# EAGLE board tiny24marquee_mitered_truncated (EAGLE 6.2)
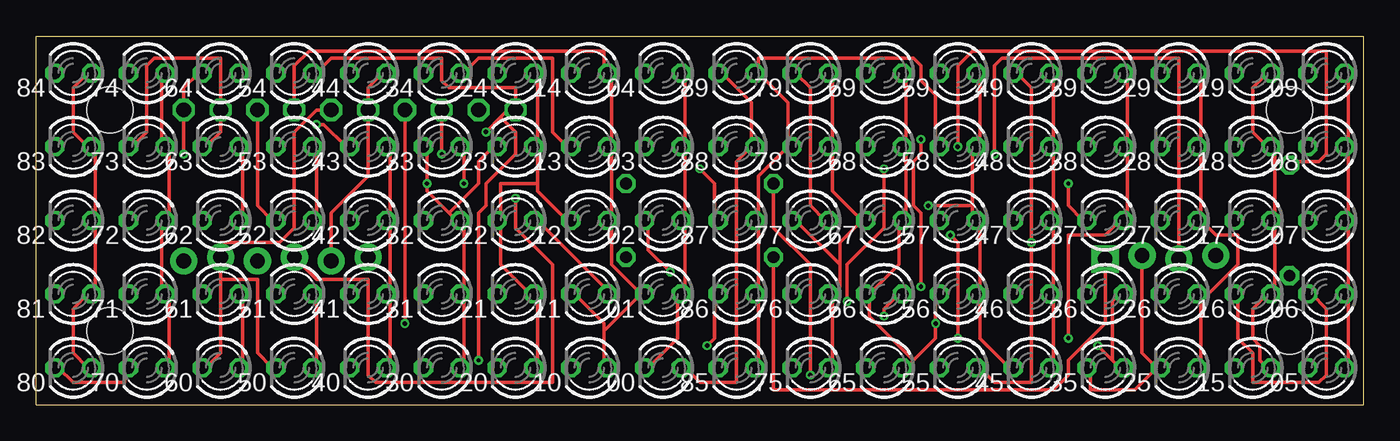
[diagram p0: board, top side]
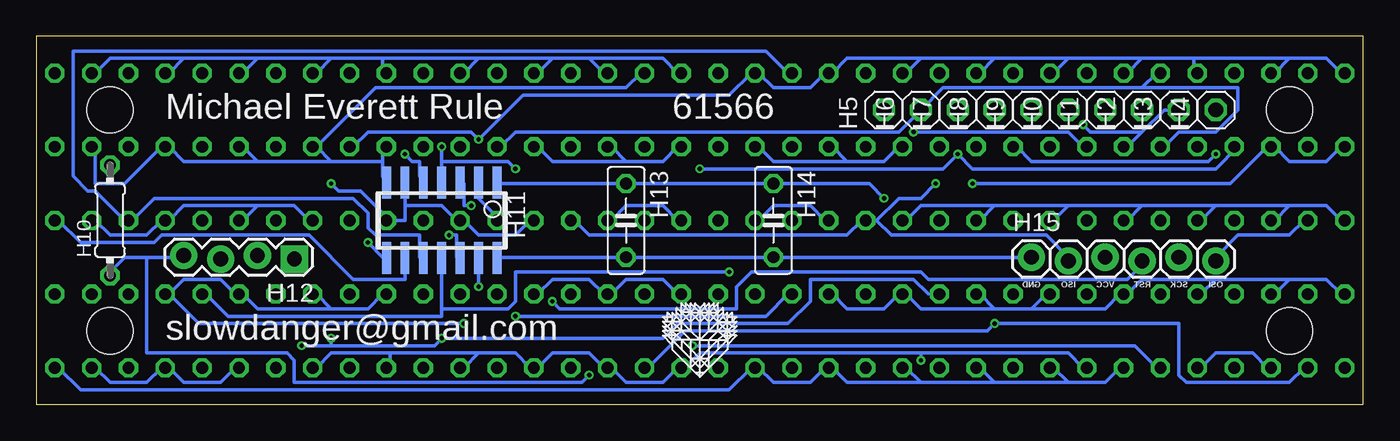
[diagram p1: board, bottom side, seen from below]

Size 91.44 x 25.4 mm. Coordinates in mm from the lower left corner, seen from the top.
Outline: 0,0 91.44,0 91.44,25.4 0,25.4 0,0
Copper layers (1*16): Top 0.035mm / dielectric 1.5mm / Bottom 0.035mm
Design rules: minimum track width 10mil, minimum drill 12mil, track to track 7mil, track to pad 7mil, pad to pad 7mil, via to via 7mil, smd to smd 0mil, copper to edge 20mil, drill to drill 10mil, minimum pad ring 10mil, minimum via ring 6mil, stop-mask expansion 2mil, vias tented up to drill 100mil, thermal gap 10mil
Holes 3.2 mm at 86.36,5.08 5.08,5.08 86.36,20.32 5.08,20.32

## Footprints (pad centres in the part's own frame; a part is rotated, then mirrored left to right if it is on the bottom)
LED3MM = drill 0.813 octagon: A -1.27,0; K 1.27,0
1X01 = drill 1.016 octagon: 1 0,0
0204/7 = drill 0.813 octagon: 1 -3.81,0; 2 3.81,0
SO14 = smd 0.61 x 2.21: 1 -3.81,-2.603; 2 -2.54,-2.603; 3 -1.27,-2.603; 4 0,-2.603; 5 1.27,-2.603; 6 2.54,-2.603; 7 3.81,-2.603; 8 3.81,2.603; 9 2.54,2.603; 10 1.27,2.603; 11 0,2.603; 12 -1.27,2.603; 13 -2.54,2.603; 14 -3.81,2.603
1X04_LOCK = drill 1.016 pad 1.88 square: 1 0,0.127 | drill 1.016 pad 1.88: 2 2.54,-0.127; 3 5.08,0.127; 4 7.62,-0.127
C050-025X075 = drill 0.813 octagon: 1 -2.54,0; 2 2.54,0
1X06_LOCK = drill 1.016 pad 1.88: 1 0,0; 2 2.54,-0.254; 3 5.08,0; 4 7.62,-0.254; 5 10.16,0; 6 12.7,-0.254

## Placement (x,y rotation side)
00  [LED3MM]  43.18,2.54 180 top
01  [LED3MM]  43.18,7.62 180 top
02  [LED3MM]  43.18,12.7 180 top
03  [LED3MM]  43.18,17.78 180 top
04  [LED3MM]  43.18,22.86 180 top
05  [LED3MM]  88.9,2.54 180 top
06  [LED3MM]  88.9,7.62 180 top
07  [LED3MM]  88.9,12.7 180 top
08  [LED3MM]  88.9,17.78 180 top
09  [LED3MM]  88.9,22.86 180 top
10  [LED3MM]  38.1,2.54 180 top
11  [LED3MM]  38.1,7.62 180 top
12  [LED3MM]  38.1,12.7 180 top
13  [LED3MM]  38.1,17.78 180 top
14  [LED3MM]  38.1,22.86 180 top
15  [LED3MM]  83.82,2.54 180 top
16  [LED3MM]  83.82,7.62 180 top
17  [LED3MM]  83.82,12.7 180 top
18  [LED3MM]  83.82,17.78 180 top
19  [LED3MM]  83.82,22.86 180 top
20  [LED3MM]  33.02,2.54 180 top
21  [LED3MM]  33.02,7.62 180 top
22  [LED3MM]  33.02,12.7 180 top
23  [LED3MM]  33.02,17.78 180 top
24  [LED3MM]  33.02,22.86 180 top
25  [LED3MM]  78.74,2.54 180 top
26  [LED3MM]  78.74,7.62 180 top
27  [LED3MM]  78.74,12.7 180 top
28  [LED3MM]  78.74,17.78 180 top
29  [LED3MM]  78.74,22.86 180 top
30  [LED3MM]  27.94,2.54 180 top
31  [LED3MM]  27.94,7.62 180 top
32  [LED3MM]  27.94,12.7 180 top
33  [LED3MM]  27.94,17.78 180 top
34  [LED3MM]  27.94,22.86 180 top
35  [LED3MM]  73.66,2.54 180 top
36  [LED3MM]  73.66,7.62 180 top
37  [LED3MM]  73.66,12.7 180 top
38  [LED3MM]  73.66,17.78 180 top
39  [LED3MM]  73.66,22.86 180 top
40  [LED3MM]  22.86,2.54 180 top
41  [LED3MM]  22.86,7.62 180 top
42  [LED3MM]  22.86,12.7 180 top
43  [LED3MM]  22.86,17.78 180 top
44  [LED3MM]  22.86,22.86 180 top
45  [LED3MM]  68.58,2.54 180 top
46  [LED3MM]  68.58,7.62 180 top
47  [LED3MM]  68.58,12.7 180 top
48  [LED3MM]  68.58,17.78 180 top
49  [LED3MM]  68.58,22.86 180 top
50  [LED3MM]  17.78,2.54 180 top
51  [LED3MM]  17.78,7.62 180 top
52  [LED3MM]  17.78,12.7 180 top
53  [LED3MM]  17.78,17.78 180 top
54  [LED3MM]  17.78,22.86 180 top
55  [LED3MM]  63.5,2.54 180 top
56  [LED3MM]  63.5,7.62 180 top
57  [LED3MM]  63.5,12.7 180 top
58  [LED3MM]  63.5,17.78 180 top
59  [LED3MM]  63.5,22.86 180 top
60  [LED3MM]  12.7,2.54 180 top
61  [LED3MM]  12.7,7.62 180 top
62  [LED3MM]  12.7,12.7 180 top
63  [LED3MM]  12.7,17.78 180 top
64  [LED3MM]  12.7,22.86 180 top
65  [LED3MM]  58.42,2.54 180 top
66  [LED3MM]  58.42,7.62 180 top
67  [LED3MM]  58.42,12.7 180 top
68  [LED3MM]  58.42,17.78 180 top
69  [LED3MM]  58.42,22.86 180 top
70  [LED3MM]  7.62,2.54 180 top
71  [LED3MM]  7.62,7.62 180 top
72  [LED3MM]  7.62,12.7 180 top
73  [LED3MM]  7.62,17.78 180 top
74  [LED3MM]  7.62,22.86 180 top
75  [LED3MM]  53.34,2.54 180 top
76  [LED3MM]  53.34,7.62 180 top
77  [LED3MM]  53.34,12.7 180 top
78  [LED3MM]  53.34,17.78 180 top
79  [LED3MM]  53.34,22.86 180 top
80  [LED3MM]  2.54,2.54 180 top
81  [LED3MM]  2.54,7.62 180 top
82  [LED3MM]  2.54,12.7 180 top
83  [LED3MM]  2.54,17.78 180 top
84  [LED3MM]  2.54,22.86 180 top
85  [LED3MM]  48.26,2.54 180 top
86  [LED3MM]  48.26,7.62 180 top
87  [LED3MM]  48.26,12.7 180 top
88  [LED3MM]  48.26,17.78 180 top
89  [LED3MM]  48.26,22.86 180 top
H0  [1X01]  20.32,20.32 90 bottom
H1  [1X01]  17.78,20.32 90 bottom
H2  [1X01]  15.24,20.32 90 bottom
H3  [1X01]  12.7,20.32 90 bottom
H4  [1X01]  10.16,20.32 90 bottom
H5  [1X01]  33.02,20.32 90 bottom
H6  [1X01]  30.48,20.32 90 bottom
H7  [1X01]  27.94,20.32 90 bottom
H8  [1X01]  25.4,20.32 90 bottom
H9  [1X01]  22.86,20.32 90 bottom
H10  [0204/7]  86.36,12.7 90 bottom
H11  [SO14]  63.5,12.7 180 bottom
H12  [1X04_LOCK]  73.66,10.16 180 bottom
H13  [C050-025X075]  50.8,12.7 270 bottom
H14  [C050-025X075]  40.64,12.7 270 bottom
H15  [1X06_LOCK]  22.86,10.16 0 bottom
H16  [LOGO]  45.72,4.45 0 bottom

## Library data of the parts
00 01-09 10-89 = led
H0 H1-H9 = pinhead
H10 H13 H14 = rcl
H11 = avr-5-4.16
H12 H15 = SparkFun
H16 = mrule2

## Nets
D: 00.A 09.K 11.A 19.K 22.A 29.K 33.A 39.K 44.A 49.K 55.A 59.K 66.A 69.K 77.A 79.K 88.A 89.K H9.1 H11.8 H15.2
S0: 00.K 01.A 02.A 03.A 04.A 05.A 06.A 07.A 08.A 09.A 10.K 20.K 30.K 40.K 50.K 60.K 70.K 80.K H0.1 H11.9 H15.5
S1: 01.K 10.A 11.K 12.A 13.A 14.A 15.A 16.A 17.A 18.A 19.A 21.K 31.K 41.K 51.K 61.K 71.K 81.K H1.1 H11.10
S2: 02.K 12.K 20.A 21.A 22.K 23.A 24.A 25.A 26.A 27.A 28.A 29.A 32.K 42.K 52.K 62.K 72.K 82.K H2.1 H11.11
S3: 03.K 13.K 23.K 30.A 31.A 32.A 33.K 34.A 35.A 36.A 37.A 38.A 39.A 43.K 53.K 63.K 73.K 83.K H3.1 H11.12
S4: 04.K 14.K 24.K 34.K 40.A 41.A 42.A 43.A 44.K 45.A 46.A 47.A 48.A 49.A 54.K 64.K 74.K 84.K H4.1 H11.13
S5: 05.K 15.K 25.K 35.K 45.K 50.A 51.A 52.A 53.A 54.A 55.K 56.A 57.A 58.A 59.A 65.K 75.K 85.K H5.1 H11.3 H12.2
S6: 06.K 16.K 26.K 36.K 46.K 56.K 60.A 61.A 62.A 63.A 64.A 65.A 66.K 67.A 68.A 69.A 76.K 86.K H6.1 H11.2
S7: 07.K 17.K 27.K 37.K 47.K 57.K 67.K 70.A 71.A 72.A 73.A 74.A 75.A 76.A 77.K 78.A 79.A 87.K H7.1 H11.6
S8: 08.K 18.K 28.K 38.K 48.K 58.K 68.K 78.K 80.A 81.A 82.A 83.A 84.A 85.A 86.A 87.A 88.K 89.A H8.1 H11.7 H15.6
S$1: H10.1 H11.1 H12.4 H13.1 H14.1 H15.3
S$2: H10.2 H11.4 H15.4
S$3: H11.14 H12.1 H13.2 H14.2 H15.1
S$4: H11.5 H12.3

## Tracks (layer width: path | path; a pad name or v marks a point on that pad's centre or on a via)
D  (via drill 0.3)
  Top 0.254: 44.A 23.88,22.86 22.86,21.84 H9.1 22.86,15.75 20.32,13.21 H15.2 | 22.A 34.54,12.7 39.12,8.13 39.12,7.62 11.A | v29.46,15.24 29.46,17.78 33.A | v58.42,6.1 58.42,6.6 59.44,7.62 66.A | 49.28,17.78 48.26,16.76 48.26,1.52 45.72,1.52 44.7,2.54 00.A | 49.28,17.78 49.28,20.83 47.24,22.86 89.K | 49.28,17.78 88.A | 49.K 67.56,22.86 68.58,21.84 v68.58,11.18 68.58,1.52 66.04,1.52 65.02,2.54 55.A | 77.A 54.36,12.7 53.34,13.72 53.34,21.84 52.32,22.86 79.K
  Bottom 0.254: v29.46,15.24 30.48,14.22 32,14.22 33.53,12.7 | 33.53,12.7 22.A 34.54,12.7 35.56,11.68 53.34,11.68 54.36,12.7 77.A | v58.42,6.1 41.15,6.1 39.62,7.62 11.A | 33.53,12.7 32.51,11.68 21.84,11.68 20.32,10.16 H15.2 | v68.58,11.18 67.56,10.16 H11.8 | 53.34,23.88 52.32,22.86 79.K | 55.88,23.88 53.34,23.88 | 55.88,23.88 56.9,22.86 69.K | 60.96,23.88 61.98,22.86 59.K | 55.88,23.88 60.96,23.88 | 71.12,23.88 72.14,22.86 39.K | 60.96,23.88 67.56,23.88 | 67.56,23.88 71.12,23.88 | 76.2,23.88 77.22,22.86 29.K | 71.12,23.88 76.2,23.88 | 81.28,23.88 82.3,22.86 19.K | 76.2,23.88 81.28,23.88 | 81.28,23.88 86.36,23.88 87.38,22.86 09.K | 67.56,23.88 67.56,22.86 49.K | 53.34,23.88 48.26,23.88 47.24,22.86 89.K
S0
  Top 0.254: 90.42,17.78 90.42,22.86 09.A | 90.42,7.62 90.42,2.54 05.A | 90.42,12.7 90.42,7.62 | 90.42,7.62 06.A | 90.42,12.7 90.42,17.78 | 90.42,17.78 08.A | 90.42,12.7 07.A | 80.K 1.52,2.54 2.54,1.52 6.1,1.52 6.1,2.54 70.K | 12.7,8.64 H15.5 12.7,11.18 16.76,11.18 17.78,12.19 17.78,18.8 19.3,20.32 H0.1 | 12.7,8.64 12.7,3.56 11.68,2.54 60.K | 00.K 42.16,2.54 44.2,4.57 44.2,7.62 01.A 44.7,7.62 44.7,12.7 | 44.7,17.78 44.7,12.7 | 44.7,17.78 44.7,22.86 04.A | 44.7,17.78 03.A | 44.7,12.7 02.A | 12.7,8.64 15.24,8.64 15.24,3.56 16.26,2.54 50.K
  Bottom 0.254: H11.9 66.04,8.64 69.6,8.64 72.64,11.68 82.8,11.68 83.31,11.18 88.39,11.18 89.92,12.7 07.A | 70.K 6.6,2.54 7.62,3.56 10.16,3.56 11.18,2.54 60.K | 20.32,1.52 17.78,1.52 16.76,2.54 50.K | 20.32,1.52 21.34,2.54 40.K | 25.4,1.52 26.42,2.54 30.K | 20.32,1.52 25.4,1.52 | 30.48,1.52 31.5,2.54 20.K | 25.4,1.52 30.48,1.52 | 30.48,1.52 35.56,1.52 36.58,2.54 10.K 37.08,2.54 38.1,1.52 40.64,1.52 41.66,2.54 00.K 42.16,2.54 43.69,1.02 88.39,1.02 89.92,2.54 05.A
S1
  Top 0.254: 15.A 84.84,2.54 84.33,3.05 84.33,4.06 83.82,4.57 83.82,6.6 84.84,7.62 16.A 85.34,7.62 85.34,12.7 | 85.34,12.7 85.34,17.78 18.A 84.84,17.78 83.82,18.8 83.82,21.84 84.84,22.86 19.A | 85.34,12.7 17.A | 39.12,5.08 39.12,2.54 10.A | 39.12,5.08 39.12,5.59 37.08,7.62 11.K | 39.12,5.08 41.66,7.62 | 39.62,17.78 39.62,12.7 | 39.62,17.78 39.62,22.86 14.A 39.12,22.86 39.12,24.38 18.8,24.38 17.78,23.37 H1.1 | 39.62,17.78 13.A | 41.66,7.62 39.62,9.65 39.62,12.7 | 41.66,7.62 01.K | 39.62,12.7 12.A
  Bottom 0.254: H11.10 65.02,10.16 65.02,11.68 68.07,11.68 68.58,12.19 68.58,13.21 69.6,14.22 83.31,14.22 84.84,12.7 17.A 85.34,12.7 87.38,14.73 87.88,14.73 88.9,15.75 88.9,24.38 41.15,24.38 39.62,22.86 14.A | 5.08,8.64 2.54,8.64 1.52,7.62 81.K | 5.08,8.64 6.1,7.62 71.K | 10.16,8.64 11.18,7.62 61.K | 5.08,8.64 10.16,8.64 | 10.16,8.64 15.24,8.64 16.26,7.62 51.K 16.76,7.62 17.78,6.6 22.86,6.6 | 22.86,6.6 21.84,7.62 41.K | 25.4,6.6 22.86,6.6 | 25.4,6.6 26.42,7.62 31.K | 25.4,6.6 30.48,6.6 31.5,7.62 21.K 32,7.62 33.02,6.6 35.56,6.6 36.58,7.62 11.K
S2  (via drill 0.3)
  Top 0.254: 80.26,17.78 80.26,12.7 | 80.26,17.78 80.26,22.86 29.A | 80.26,17.78 28.A | 80.26,7.11 80.26,7.62 26.A 80.26,7.11 | 80.26,7.11 80.26,2.54 25.A | 80.26,12.7 81.28,11.68 82.8,11.68 82.8,9.65 80.26,7.11 | 80.26,12.7 27.A | 34.54,17.78 34.54,22.86 24.A | 34.54,17.78 34.54,15.24 | 34.54,15.24 34.54,14.73 36.58,12.7 12.K | 34.54,17.78 23.A | 20.A 34.54,2.54 34.54,7.62 21.A 34.04,7.62 32,9.65 32,12.7 | H2.1 15.24,13.72 16.26,12.7 52.K | 34.54,15.24 32,15.24 32,12.7 | 32,12.7 22.K | v43.69,9.14 42.16,10.67 42.16,12.7 02.K
  Bottom 0.254: 63.5,6.6 63.5,6.1 78.23,6.1 79.76,7.62 26.A | 63.5,6.6 H11.11 | 02.K 41.66,12.7 40.64,13.72 38.1,13.72 37.08,12.7 12.K | 5.08,13.72 2.54,13.72 1.52,12.7 82.K | 5.08,13.72 6.1,12.7 72.K | 10.16,13.72 11.18,12.7 62.K | 5.08,13.72 10.16,13.72 | 15.24,13.72 16.26,12.7 52.K | 10.16,13.72 15.24,13.72 | 20.32,13.72 21.34,12.7 42.K | 15.24,13.72 20.32,13.72 | 25.4,13.72 26.42,12.7 32.K | 20.32,13.72 25.4,13.72 | 25.4,13.72 30.48,13.72 31.5,12.7 22.K | 63.5,6.6 58.93,6.6 58.42,7.11 58.42,9.14 v43.69,9.14
S3  (via drill 0.3)
  Top 0.254: 75.18,17.78 75.18,12.7 37.A 74.68,12.7 73.66,11.68 71.12,11.68 v71.12,4.57 | 75.18,17.78 75.18,22.86 39.A | 75.18,17.78 38.A | v62.99,11.68 63.5,11.18 v63.5,4.57 | 74.17,3.05 74.68,2.54 35.A | 74.17,3.05 v73.15,4.06 | 74.17,3.05 74.17,7.11 74.68,7.62 36.A | 63.K 11.68,17.78 12.7,18.8 H3.1 12.7,23.88 8.13,23.88 7.62,23.37 7.62,18.8 6.6,17.78 73.K | v19.3,19.3 19.81,19.3 21.34,17.78 43.K | 29.46,7.62 29.46,2.54 30.A | 29.46,7.62 29.46,12.7 32.A 28.96,12.7 28.45,13.21 | 29.46,7.62 31.A | 28.45,13.21 26.92,14.73 v26.92,15.24 26.92,17.78 33.K | 34.A 29.46,22.86 30.48,23.88 35.56,23.88 35.56,18.8 36.58,17.78 13.K | 28.45,13.21 30.48,15.24 30.48,16.76 31.5,17.78 23.K
  Bottom 0.254: v62.99,11.68 62.48,11.68 62.48,10.16 H11.12 | v73.15,4.06 71.12,4.06 | 71.12,4.06 64.01,4.06 v63.5,4.57 48.26,4.57 47.24,5.59 39.62,5.59 38.1,7.11 38.1,8.64 30.99,8.64 29.97,7.62 31.A | 71.12,4.06 v71.12,4.57 | 83.K 1.52,17.78 2.54,16.76 5.08,16.76 6.1,17.78 73.K 6.6,17.78 9.14,15.24 v26.92,15.24 | 15.24,18.8 13.72,20.32 H3.1 | 15.24,18.8 16.26,17.78 53.K | v19.3,19.3 18.8,18.8 15.24,18.8 | 35.56,16.76 33.02,16.76 32,17.78 23.K | 35.56,16.76 36.58,17.78 13.K | 35.56,16.76 40.64,16.76 41.66,17.78 03.K
S4  (via drill 0.3)
  Top 0.254: 70.1,7.62 70.1,2.54 45.A | v60.96,8.13 60.96,13.21 60.45,13.72 60.45,16.76 60.96,17.27 v60.96,18.29 | 70.1,17.78 70.1,12.7 | 70.1,17.78 70.1,22.86 49.A | 70.1,17.78 48.A | 70.1,12.7 70.1,7.62 | 70.1,7.62 46.A | 70.1,12.7 47.A | 24.38,7.62 24.38,2.54 40.A | 24.38,12.7 24.38,17.78 43.A | 24.38,12.7 24.38,7.62 | 24.38,7.62 41.A | 24.38,12.7 42.A | 64.K 11.18,22.86 10.16,21.84 H4.1 v10.16,17.27
  Bottom 0.254: v60.96,8.13 H11.13 | 48.A 69.6,17.78 68.58,18.8 61.47,18.8 v60.96,18.29 57.91,21.34 43.69,21.34 42.16,22.86 04.K 41.66,22.86 40.64,21.84 38.1,21.84 37.08,22.86 14.K 36.58,22.86 35.56,23.88 30.48,23.88 | 5.08,23.88 2.54,23.88 1.52,22.86 84.K | 5.08,23.88 6.1,22.86 74.K | 15.24,23.88 16.26,22.86 54.K | 5.08,23.88 11.68,23.88 | 11.68,23.88 15.24,23.88 | 20.32,23.88 21.34,22.86 44.K | 15.24,23.88 20.32,23.88 | 25.4,23.88 26.42,22.86 34.K | 20.32,23.88 25.4,23.88 | 30.48,23.88 31.5,22.86 24.K | 25.4,23.88 30.48,23.88 | 11.68,23.88 11.68,22.86 64.K | v10.16,17.27 10.67,16.76 22.86,16.76 23.88,17.78 43.A
S5  (via drill 0.3)
  Top 0.254: 77.22,2.54 76.2,3.56 H12.2 | 64.52,13.72 v61.47,13.72 | 64.52,13.72 64.52,12.7 57.A 65.02,12.7 65.02,7.62 | 65.02,7.62 65.02,4.57 67.06,2.54 45.K | 65.02,7.62 56.A | 64.52,13.72 64.52,17.78 58.A 65.02,17.78 65.02,22.86 59.A | 77.22,2.54 75.69,1.02 72.64,1.02 72.64,2.54 35.K | 77.22,2.54 25.K | 52.A 19.3,12.7 19.3,17.78 53.A | 33.02,20.83 33.02,21.84 28.45,21.84 27.94,22.35 27.94,23.88 20.32,23.88 19.3,22.86 54.A | 33.02,20.83 32,19.81 | 32,19.81 v30.99,18.8 | 33.02,20.83 H5.1 | 50.A 19.3,2.54 19.3,7.62 51.A | 32,19.81 33.02,18.8 33.02,17.27 30.99,15.24 30.99,13.72 30.48,13.21 v30.48,3.05
  Bottom 0.254: 05.K 87.38,2.54 86.36,1.52 83.82,1.52 82.8,2.54 15.K 82.3,2.54 81.28,1.52 78.74,1.52 77.72,2.54 25.K | 60.96,3.56 58.42,3.56 57.4,2.54 65.K 56.9,2.54 55.88,3.56 53.34,3.56 52.32,2.54 75.K 51.82,2.54 50.8,1.52 48.26,1.52 47.24,2.54 85.K 46.74,2.54 45.72,3.56 30.48,3.56 | 60.96,3.56 61.98,2.54 55.K | 60.96,3.56 67.06,3.56 | 67.06,3.56 71.12,3.56 72.14,2.54 35.K | v61.47,13.72 61.98,13.72 61.98,15.24 H11.3 | 67.06,3.56 67.06,2.54 45.K | v30.99,18.8 20.32,18.8 19.3,17.78 53.A | 30.48,3.56 20.32,3.56 19.3,2.54 50.A | 30.48,3.56 v30.48,3.05
S6  (via drill 0.3)
  Top 0.254: 60.A 14.22,2.54 14.22,7.62 61.A | v46.23,4.06 46.74,4.57 46.74,7.62 86.K | 62.A 14.22,12.7 14.22,17.78 63.A | 06.K 87.88,7.62 88.9,6.6 88.9,2.03 88.39,1.52 83.82,1.52 83.82,3.56 82.8,4.57 82.8,7.62 16.K | 60.45,3.05 61.98,4.57 v61.98,5.59 61.98,7.62 56.K | 60.45,3.05 59.94,2.54 65.A | 59.94,17.78 59.94,22.86 69.A | 57.4,7.62 59.44,9.65 59.44,12.7 67.A 59.94,12.7 59.94,17.78 | 59.94,17.78 68.A | 60.45,3.05 57.4,6.1 57.4,7.62 | 57.4,7.62 66.K
  Bottom 0.254: 86.K 47.24,7.62 48.26,8.64 50.8,8.64 51.82,7.62 76.K 52.32,7.62 53.34,8.64 55.88,8.64 56.9,7.62 66.K | v46.23,4.06 15.75,4.06 14.22,2.54 60.A | 15.24,21.84 14.22,22.86 64.A | 15.24,21.84 28.96,21.84 H6.1 32,18.8 58.42,18.8 59.44,17.78 68.A | 15.24,21.84 8.64,21.84 8.64,20.32 10.16,18.8 12.7,18.8 13.72,17.78 63.A | 71.12,6.6 68.58,6.6 67.56,7.62 46.K | 71.12,6.6 72.14,7.62 36.K | 71.12,6.6 76.2,6.6 77.22,7.62 26.K 77.72,7.62 78.74,8.64 81.28,8.64 82.3,7.62 | H11.2 60.96,14.22 59.44,12.7 67.A | 82.3,7.62 80.26,5.59 v61.98,5.59 | 82.3,7.62 16.K
S7  (via drill 0.3)
  Top 0.254: 70.A 9.14,2.54 9.14,7.62 71.A 8.64,7.62 8.64,12.7 72.A 9.14,12.7 9.14,17.78 73.A 8.64,17.78 8.64,22.86 74.A | v27.94,17.27 H7.1 | 54.86,7.62 54.86,2.54 75.A | 54.86,17.78 54.86,22.86 79.A | 56.9,12.7 54.86,14.73 54.86,17.78 | 54.86,17.78 78.A | 54.86,7.62 55.37,8.13 55.37,9.65 | 55.37,9.65 55.37,11.18 56.9,12.7 | 54.86,7.62 76.A | 56.9,12.7 67.K | 55.37,9.65 52.32,12.7 77.K | v71.12,15.24 71.12,13.72 72.14,12.7 37.K | v45.72,16.26 46.74,15.24 46.74,12.7 87.K
  Bottom 0.254: 73.A 8.64,17.78 10.16,16.26 26.92,16.26 v27.94,17.27 28.96,16.26 v45.72,16.26 | 76.2,13.72 73.66,13.72 72.64,12.7 37.K | 76.2,13.72 77.22,12.7 27.K | 76.2,13.72 81.28,13.72 82.3,12.7 17.K 82.8,12.7 83.82,11.68 86.36,11.68 87.38,12.7 07.K | 66.04,13.72 66.04,12.7 67.06,12.7 | 66.04,13.72 H11.6 | 66.04,13.72 63.5,13.72 62.48,12.7 57.K 61.98,12.7 60.96,11.68 58.42,11.68 57.4,12.7 67.K | 87.K 47.24,12.7 48.26,13.72 50.8,13.72 51.82,12.7 77.K | v71.12,15.24 70.61,14.73 69.09,14.73 67.06,12.7 | 67.06,12.7 47.K
S8  (via drill 0.3)
  Top 0.254: 80.A 3.56,2.54 2.54,3.56 2.54,6.6 3.56,7.62 81.A 4.06,7.62 4.06,12.7 | 4.06,12.7 4.06,17.78 83.A 3.56,17.78 2.54,18.8 2.54,21.84 3.56,22.86 84.A | 4.06,12.7 82.A | 49.78,22.86 51.82,20.83 51.82,17.78 | 49.78,22.86 49.78,23.88 60.45,23.88 60.96,23.37 60.96,22.35 61.98,21.34 61.98,17.78 58.K | 49.78,22.86 89.A | 49.78,7.62 49.78,2.54 85.A | 49.78,7.62 49.78,12.7 | 49.78,7.62 86.A | v25.4,5.59 H8.1 | 51.82,17.78 49.78,15.75 49.78,12.7 | 51.82,17.78 78.K | 49.78,12.7 87.A
  Bottom 0.254: H15.6 10.16,10.16 8.64,11.68 5.08,11.68 4.06,12.7 82.A | 67.56,16.76 67.56,17.78 48.K | 67.56,16.76 67.56,15.75 H11.7 | 71.12,16.76 72.14,17.78 | 67.56,16.76 71.12,16.76 | 76.2,16.76 77.22,17.78 28.K | 71.12,16.76 76.2,16.76 | 76.2,16.76 81.28,16.76 82.3,17.78 18.K 82.8,17.78 85.34,15.24 87.38,15.24 87.38,17.78 08.K | 50.8,16.76 48.26,16.76 47.24,17.78 88.K | 50.8,16.76 51.82,17.78 78.K | 50.8,16.76 55.88,16.76 56.9,17.78 68.K | 85.A 49.28,2.54 46.74,5.08 25.91,5.08 v25.4,5.59 12.7,5.59 12.7,2.03 12.19,1.52 5.08,1.52 4.06,2.54 80.A | 72.14,17.78 68.07,21.84 50.8,21.84 49.78,22.86 89.A | 72.14,17.78 38.K
S$1  (via drill 0.3)
  Top 0.254: H15.3 19.3,8.64 22.86,8.64 22.86,2.03 23.37,1.52 35.56,1.52 35.56,9.65 33.02,12.19 v33.02,14.22 | v53.34,2.03 53.34,9.65 50.8,12.19 H13.1
  Bottom 0.254: 83.82,10.16 81.28,10.16 H12.4 | 83.82,10.16 85.34,10.16 86.36,9.14 H10.1 | H11.1 59.44,15.24 H13.1 H14.1 34.04,15.24 v33.02,14.22 | 83.82,10.16 83.82,3.56 74.17,3.56 73.66,3.05 73.66,1.52 53.85,1.52 v53.34,2.03
S$2  (via drill 0.3)
  Top 0.254: v63.5,17.78 63.5,23.37 64.52,24.38 88.9,24.38 88.9,17.27 88.39,16.76 86.36,16.76 H10.2 | v55.88,7.11 55.88,9.65 58.42,12.19 v58.42,16.26
  Bottom 0.254: v63.5,17.78 63.5,16.76 | 63.5,16.76 H11.4 | v55.88,7.11 55.37,6.6 43.18,6.6 43.18,8.13 42.16,9.14 30.48,9.14 29.97,8.64 16.26,8.64 15.24,9.65 H15.4 | v58.42,16.26 58.93,16.76 63.5,16.76
S$3
  Top 0.254: H12.1 73.66,5.59 71.12,3.05 71.12,2.03 70.1,1.02 50.8,1.02 H13.2
  Bottom 0.254: H11.14 59.44,10.16 H13.2 H14.2 H15.1
S$4  (via drill 0.3)
  Top 0.254: v66.04,17.27 66.04,23.37 66.55,23.88 78.74,23.88 H12.3
  Bottom 0.254: v66.04,17.27 65.53,16.76 65.02,16.76 65.02,15.75 H11.5

## Text on the board
bPlace: 61566 | Michael Everett Rule | slowdanger@gmail.com
_bsilk: OSI | SCK | RST | VCC | ISO | GND